# EAGLE board mainboard (EAGLE 6.2)
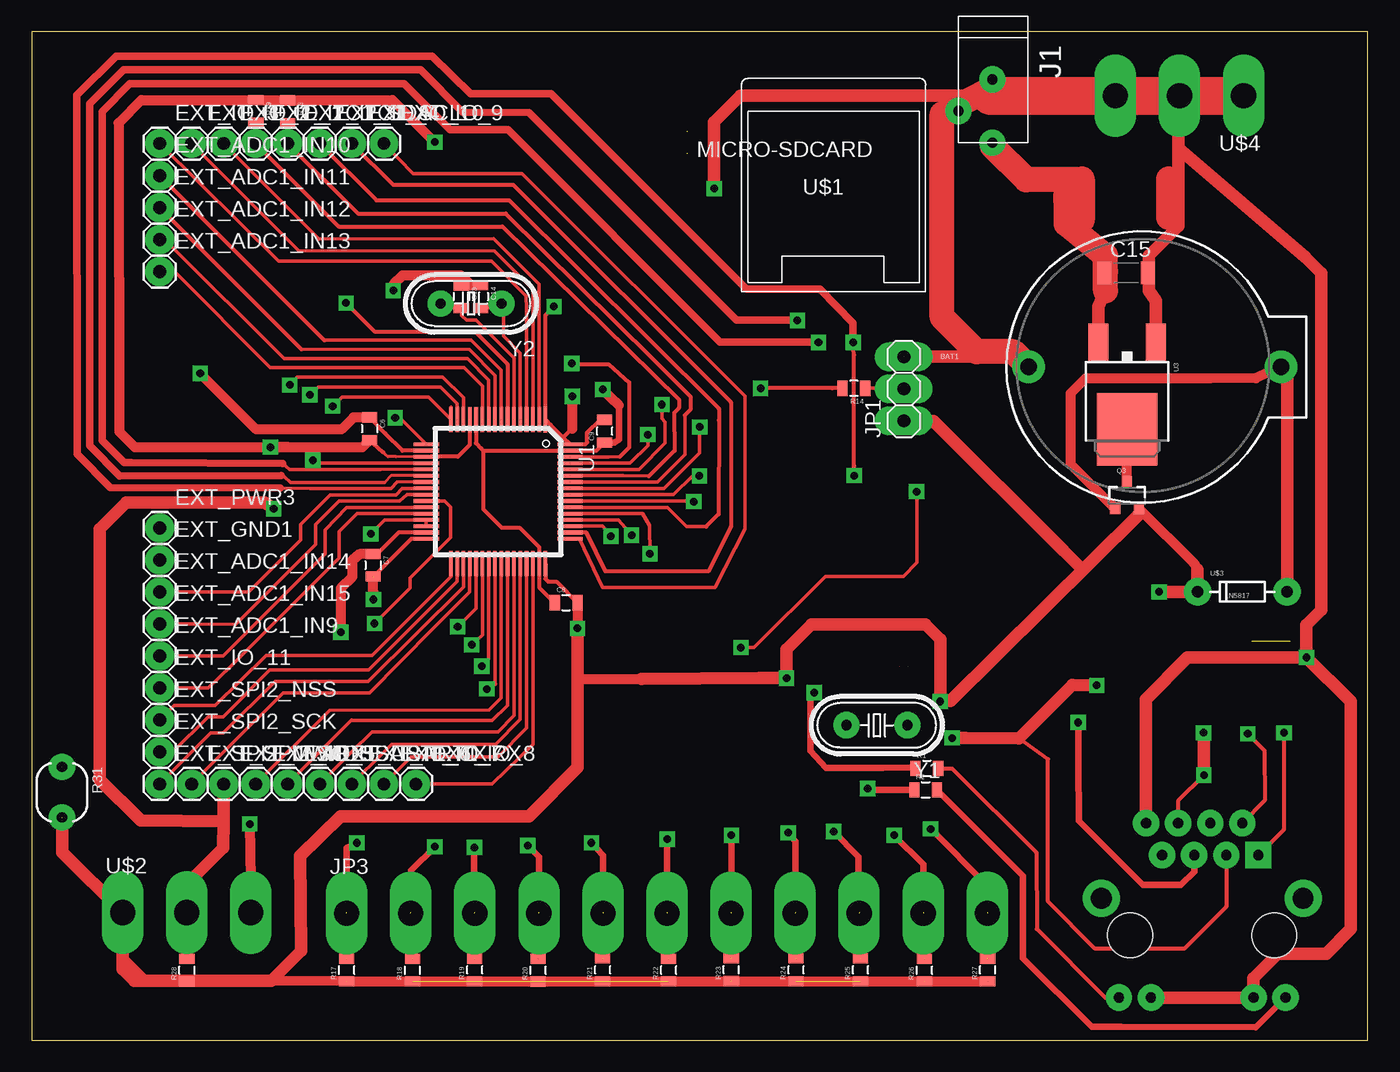
[diagram p0: board, top side]
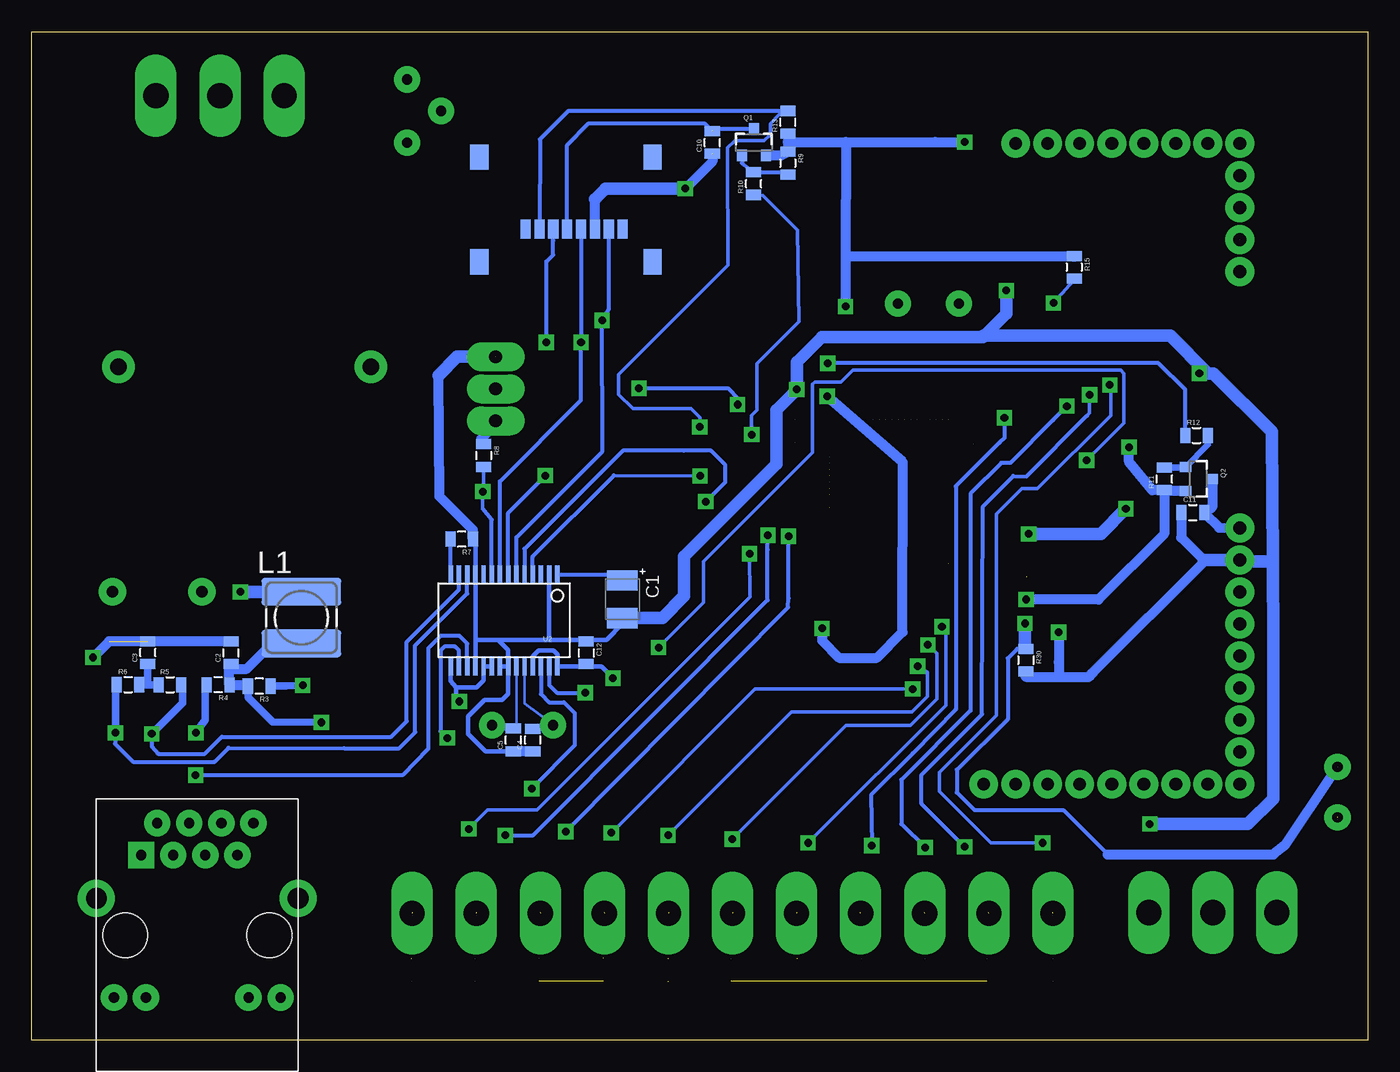
[diagram p1: board, bottom side, seen from below]

Size 105.97 x 79.98 mm. Coordinates in mm from the lower left corner, seen from the top.
Outline: 0,0 105.97,0 105.97,79.98 0,79.98 0,0
Copper layers (1*16): Top 0.035mm / dielectric 1.5mm / Bottom 0.035mm
Design rules: minimum track width 10mil, minimum drill 32mil, track to track 12mil, track to pad 12mil, pad to pad 12mil, via to via 12mil, smd to smd 8mil, copper to edge 40mil, drill to drill 40mil, minimum pad ring 25mil, minimum via ring 12mil, stop-mask expansion 4mil, vias tented up to drill 0mil, thermal gap 10mil

## Footprints (pad centres in the part's own frame; a part is rotated, then mirrored left to right if it is on the bottom)
BATTCOM_20MM_PTH = drill 1.3: 1 20,0; 2 0,0
SMC_B = smd 1.6 x 2.4: + -1.5,0; - 1.5,0
0805 = smd 0.8 x 1.2: 1 -0.9,0; 2 0.9,0
C1206 = smd 1.092 x 1.8: 1 -1.718,0; 2 1.718,0
1X01 = drill 1.016 pad 1.88: 1 0,0
POWER_JACK_4.5 = drill 0.8: GND@1 0,0; GND@2 2.7,2.5; PWR 0,5
1X03 = drill 1.016 long: 1 -2.54,0; 2 0,0; 3 2.54,0
1X11 = drill 2 long: 1 -12.7,0; 2 -7.62,0; 3 -2.54,0; 4 2.54,0; 5 7.62,0; 6 12.7,0; 7 17.78,0; 8 22.86,0; 9 27.94,0; 10 33.02,0; 11 38.1,0
POWER-CHOKE_WE-TPC = smd 6.3 x 2.2: 1 0,2.05; 2 0,-2.05
SOT23-3 = smd 0.8 x 0.9: 1 -0.95,-1; 2 0.95,-1; 3 0,1.1
PHOTOCELL = drill 0.8 pad 1.676: 1 -2,0; 2 2,0
HR911105A = drill 0.813 pad 1.524: G+ 4.953,-6.604; G- 4.953,-4.064; GND -8.89,4.445; NC -6.35,3.175; P4 -8.89,-0.635; P5 -6.35,0.635; RD+ -6.35,-1.905; RD- -8.89,1.905; TD- -8.89,-3.175; Y+ 4.953,6.604; Y- 4.953,4.064 | drill 1.651 pad 2.159: SHIELD0 -2.921,8.001; SHIELD1 -2.921,-8.001 | drill 0.813 pad 1.524 square: TD+ -6.35,-4.445 | hole 3.556: 0,-5.715; 0,5.715
LQFP64_MILL = smd 2 x 0.287: 1 -5.7,3.75; 2 -5.7,3.25; 3 -5.7,2.75; 4 -5.7,2.25; 5 -5.7,1.75; 6 -5.7,1.25; 7 -5.7,0.75; 8 -5.7,0.25; 9 -5.7,-0.25; 10 -5.7,-0.75; 11 -5.7,-1.25; 12 -5.7,-1.75; 13 -5.7,-2.25; 14 -5.7,-2.75; 15 -5.7,-3.25; 16 -5.7,-3.75; 33 5.7,-3.75; 34 5.7,-3.25; 35 5.7,-2.75; 36 5.7,-2.25; 37 5.7,-1.75; 38 5.7,-1.25; 39 5.7,-0.75; 40 5.7,-0.25; 41 5.7,0.25; 42 5.7,0.75; 43 5.7,1.25; 44 5.7,1.75; 45 5.7,2.25; 46 5.7,2.75; 47 5.7,3.25; 48 5.7,3.75 | smd 0.287 x 2: 17 -3.75,-5.7; 18 -3.25,-5.7; 19 -2.75,-5.7; 20 -2.25,-5.7; 21 -1.75,-5.7; 22 -1.25,-5.7; 23 -0.75,-5.7; 24 -0.25,-5.7; 25 0.25,-5.7; 26 0.75,-5.7; 27 1.25,-5.7; 28 1.75,-5.7; 29 2.25,-5.7; 30 2.75,-5.7; 31 3.25,-5.7; 32 3.75,-5.7; 49 3.75,5.7; 50 3.25,5.7; 51 2.75,5.7; 52 2.25,5.7; 53 1.75,5.7; 54 1.25,5.7; 55 0.75,5.7; 56 0.25,5.7; 57 -0.25,5.7; 58 -0.75,5.7; 59 -1.25,5.7; 60 -1.75,5.7; 61 -2.25,5.7; 62 -2.75,5.7; 63 -3.25,5.7; 64 -3.75,5.7
SSOP28DB = smd 0.348 x 1.397: 1 -4.225,-3.656; 2 -3.575,-3.656; 3 -2.925,-3.656; 4 -2.275,-3.656; 5 -1.625,-3.656; 6 -0.975,-3.656; 7 -0.325,-3.656; 8 0.325,-3.656; 9 0.975,-3.656; 10 1.625,-3.656; 11 2.275,-3.656; 12 2.925,-3.656; 13 3.575,-3.656; 14 4.225,-3.656; 15 4.225,3.656; 16 3.575,3.656; 17 2.925,3.656; 18 2.275,3.656; 19 1.625,3.656; 20 0.975,3.656; 21 0.325,3.656; 22 -0.325,3.656; 23 -0.975,3.656; 24 -1.625,3.656; 25 -2.275,3.656; 26 -2.925,3.656; 27 -3.575,3.656; 28 -4.225,3.656
DPAK = smd 1.6 x 3: 1 -2.28,-5.31; 3 2.28,-5.31 | smd 4.826 x 5.715: 4 0,1.588
MICRO-SDCARD = smd 0.8 x 1.5 bottom: CD/DAT3 -2.1,0.75; CLK 1.2,0.75; CMD -1,0.75; DAT0 3.4,0.75; DAT1 4.5,0.75; DAT2 -3.2,0.75; GND 2.3,0.75; VCC 0.1,0.75 | smd 1.45 x 2 bottom: DAT3 -6.875,-4.95; DAT4 6.875,-4.95; DAT5 -6.875,3.35; DAT6 6.875,3.35
1X3_2.5 = drill 2 long: 1 -5.08,0; 2 0,0; 3 5.08,0
DIODE-ZENER = drill 0.9: P$1 -3.556,0; P$2 3.556,0
HC49U-V = drill 0.813: 1 -2.413,0; 2 2.413,0

## Placement (x,y rotation side)
BAT1  3V  [BATTCOM_20MM_PTH]  79.07,53.37 0 top
C1  10u  [SMC_B]  59.13,34.96 270 bottom
C2  10n  [0805]  90.15,30.71 90 bottom
C3  10n  [0805]  96.75,30.72 90 bottom
C4  18p  [0805]  66.23,23.79 90 bottom
C5  18p  [0805]  67.77,23.8 90 bottom
C6  100n  [0805]  26.81,48.48 270 top
C7  100n  [0805]  27.09,37.65 270 top
C8  100n  [0805]  42.39,34.67 0 top
C9  100n  [0805]  45.44,48.29 90 top
C10  100n  [0805]  52,71.18 90 bottom
C11  100n  [0805]  13.89,41.83 0 bottom
C12  100n  [0805]  61.99,30.71 270 bottom
C13  22p  [0805]  34.08,58.95 270 top
C14  22p  [0805]  35.6,58.96 270 top
C15  470nF  [C1206]  86.79,60.84 0 top
EXT_1WIRE  [1X01]  15.24,20.3 0 top
EXT_ADC1_IN9  [1X01]  10.16,30.46 0 top
EXT_ADC1_IN10  [1X01]  10.16,68.56 0 top
EXT_ADC1_IN11  [1X01]  10.16,66.02 0 top
EXT_ADC1_IN12  [1X01]  10.16,63.48 0 top
EXT_ADC1_IN13  [1X01]  10.16,60.94 0 top
EXT_ADC1_IN14  [1X01]  10.16,35.54 0 top
EXT_ADC1_IN15  [1X01]  10.16,33 0 top
EXT_GND1  [1X01]  10.16,38.08 0 top
EXT_I2C1_SCL  [1X01]  20.32,71.1 0 top
EXT_I2C1_SDA  [1X01]  17.78,71.1 0 top
EXT_IO_1  [1X01]  15.24,71.1 0 top
EXT_IO_2  [1X01]  12.7,71.1 0 top
EXT_IO_3  [1X01]  10.16,71.1 0 top
EXT_IO_4  [1X01]  22.86,71.1 0 top
EXT_IO_5  [1X01]  17.78,20.3 0 top
EXT_IO_6  [1X01]  25.4,20.3 0 top
EXT_IO_7  [1X01]  27.94,20.3 0 top
EXT_IO_8  [1X01]  30.48,20.3 0 top
EXT_IO_9  [1X01]  27.94,71.1 0 top
EXT_IO_10  [1X01]  25.4,71.1 0 top
EXT_IO_11  [1X01]  10.16,27.92 0 top
EXT_PWR3  [1X01]  10.16,40.62 0 top
EXT_SPI2_MISO  [1X01]  10.16,20.3 0 top
EXT_SPI2_MOSI  [1X01]  12.7,20.3 0 top
EXT_SPI2_NSS  [1X01]  10.16,25.38 0 top
EXT_SPI2_SCK  [1X01]  10.16,22.84 0 top
EXT_USART1_RX  [1X01]  22.86,20.3 0 top
EXT_USART1_TX  [1X01]  20.32,20.3 0 top
J1  PowJack4.5  [POWER_JACK_4.5]  76.2,76.18 180 top
JP1  [1X03]  69.16,51.64 90 top
JP3  [1X11]  37.69,10.06 0 top
L1  100 uH  [POWER-CHOKE_WE-TPC]  84.57,33.5 0 bottom
Q1  SI2301  [SOT23-3]  48.7,71.16 0 bottom
Q2  SI2301  [SOT23-3]  13.46,44.5 270 bottom
Q3  IRLML6402TRPBF  [SOT23-3]  86.87,43.17 0 top
R1  150  [0805]  70.99,21.54 0 top
R2  150  [0805]  70.9,19.84 0 top
R3  50 1%  [0805]  87.91,28.07 180 bottom
R4  50 1%  [0805]  91.17,28.17 180 bottom
R5  50 1%  [0805]  94.99,28.17 0 bottom
R6  50 1%  [0805]  98.32,28.18 0 bottom
R7  2k 1%  [0805]  71.86,39.72 180 bottom
R8  10k  [0805]  70.12,46.35 270 bottom
R9  10k  [0805]  46,69.54 270 bottom
R10  470  [0805]  48.72,67.92 90 bottom
R11  10k  [0805]  16.14,44.5 90 bottom
R12  470  [0805]  13.59,47.95 0 bottom
R13  10k  [0805]  46,72.78 90 bottom
R14  10k  [0805]  65.21,51.68 180 top
R15  10k  [0805]  23.29,61.28 270 bottom
R16  4.7k  [0805]  20.31,73.61 270 top
R17  10k  [0805]  24.99,5.55 90 top
R18  10k  [0805]  30.21,5.54 90 top
R19  10k  [0805]  35.14,5.56 90 top
R20  10k  [0805]  40.16,5.54 90 top
R21  10k  [0805]  45.28,5.57 90 top
R22  10k  [0805]  50.52,5.55 90 top
R23  10k  [0805]  55.49,5.58 90 top
R24  10k  [0805]  60.62,5.57 90 top
R25  10k  [0805]  65.74,5.57 90 top
R26  10k  [0805]  70.8,5.54 90 top
R27  10k  [0805]  75.82,5.56 90 top
R28  4.7k  [0805]  12.33,5.54 90 top
R29  4.7k  [0805]  17.79,73.63 270 top
R30  4.7k  [0805]  27.13,30.12 270 bottom
R31  PHOTOCELLPTH  [PHOTOCELL]  2.41,19.65 270 top
RJ1  HR911105A  [HR911105A]  92.83,8.32 270 bottom
U1  STM32F10XRXT6LQFP64  [LQFP64_MILL]  37,43.5 270 top
U2  [SSOP28DB]  68.5,33.28 180 bottom
U3  LM1117  [DPAK]  86.88,50.02 180 top
U$1  MICRO-SDCARD  [MICRO-SDCARD]  63.6,65.06 180 top
U$2  1X3_2.5  [1X3_2.5]  12.3,10.12 0 top
U$3  1N5817  [DIODE-ZENER]  96.01,35.55 0 top
U$4  1X3_2.5  [1X3_2.5]  91.03,74.88 180 top
Y1  25 MHz  [HC49U-V]  67.04,24.96 180 top
Y2  8 MHz  [HC49U-V]  34.86,58.41 180 top

## Library data of the parts
BAT1 R31 U$3 = SparkFun
C1-C14 EXT_1WIRE EXT_ADC1_IN9-EXT_ADC1_IN15 EXT_GND1 EXT_I2C1_SCL EXT_I2C1_SDA EXT_IO_1-EXT_IO_11 EXT_PWR3 EXT_SPI2_MISO EXT_SPI2_MOSI EXT_SPI2_NSS EXT_SPI2_SCK EXT_USART1_RX EXT_USART1_TX J1 JP1 JP3 L1 Q1-Q3 R1-R30 RJ1 U1-U3 U$1 U$2 U$4 Y1 Y2 = GravicapaLib
C15 = rcl

## Nets
+3V3: C6.2 C7.2 C8.2 C9.2 C12.2 JP1.1 L1.1 Q1.2 Q2.2 Q3.2 R8.1 R9.1 R11.1 R13.1 R15.1 R16.1 R17.1 R18.1 R19.1 R20.1 R21.1 R22.1 R23.1 R24.1 R25.1 R26.1 R27.1 R28.1 R29.1 R31.2 U1.1 U1.13 U1.19 U1.32 U1.48 U1.64 U2.15 U2.19 U2.20 U2.25 U2.28 U$2.1 U$3.P$1
ALARM_BUS0: JP3.1 R17.2 U1.14
ALARM_BUS1: JP3.2 R18.2 U1.15
ALARM_BUS2: JP3.3 R19.2 U1.16
ALARM_BUS3: JP3.4 R20.2 U1.17
ALARM_BUS4: JP3.5 R21.2 U1.37
ALARM_BUS5: JP3.6 R22.2 U1.38
ALARM_BUS6: JP3.7 R23.2 U1.39
ALARM_BUS7: JP3.8 R24.2 U1.40
ALARM_BUS8: JP3.9 R25.2 U1.51
ALARM_BUS9: JP3.10 R26.2 U1.52
ALARM_BUS10: JP3.11 R27.2 U1.53
ETH_CS: R8.2 U1.20 U2.9
ETH_INT: U1.56 U2.4
ETH_NC: U1.55 U2.5
EXT_PWR: C11.2 EXT_PWR3.1 Q2.3
EXT_PWR_SW: R12.1 U1.62
GND: BAT1.2 C1.- C2.2 C3.2 C4.1 C5.1 C6.1 C7.1 C8.1 C9.1 C10.1 C11.1 C12.1 C13.1 C14.1 C15.2 EXT_GND1.1 J1.GND@1 J1.GND@2 JP1.3 R7.1 R30.2 RJ1.G- RJ1.GND RJ1.Y- U1.12 U1.18 U1.31 U1.47 U1.63 U2.2 U2.11 U2.18 U2.21 U2.22 U3.1 U$1.GND U$2.3 U$4.1 U$4.2 U$4.3
I2C1_SCL: EXT_I2C1_SCL.1 R16.2 U1.58
I2C1_SDA: EXT_I2C1_SDA.1 R29.2 U1.59
LEDA: R1.1 U2.27
LEDB: R2.1 U2.26
N$1: C2.1 L1.2 R3.2 R4.1 RJ1.P5
N$2: R2.2 RJ1.G+
N$3: R1.2 RJ1.Y+
N$4: R7.2 U2.14
N$5: C5.2 U2.23 Y1.1
N$6: C4.2 U2.24 Y1.2
N$7: C1.+ U2.1
N$8: Q2.1 R11.2 R12.2
N$9: C3.1 R5.1 R6.2
N$10: Q1.1 R9.2 R10.2
N$11: C10.2 Q1.3 U$1.VCC
N$12: EXT_IO_1.1 U1.2
N$13: R14.2 U1.60
N$14: JP1.2 R14.1
N$15: R15.2 U1.7
N$16: C14.2 U1.5 Y2.1
N$17: C13.2 U1.6 Y2.2
N$18: C15.1 J1.PWR U3.3
N$19: EXT_IO_2.1 U1.3
N$20: EXT_IO_3.1 U1.4
N$21: EXT_IO_4.1 U1.54
N$22: EXT_IO_5.1 U1.41
N$23: EXT_USART1_TX.1 U1.42
N$24: EXT_USART1_RX.1 U1.43
N$25: EXT_IO_6.1 U1.44
N$26: EXT_IO_7.1 U1.45
N$27: EXT_IO_8.1 U1.46
N$28: EXT_IO_9.1 U1.49
N$29: EXT_IO_10.1 U1.50
N$30: R30.1 R31.1 U1.26
N$31: EXT_ADC1_IN9.1 U1.27
N$32: EXT_ADC1_IN15.1 U1.25
N$33: EXT_ADC1_IN14.1 U1.24
N$34: EXT_ADC1_IN13.1 U1.11
N$35: EXT_ADC1_IN12.1 U1.10
N$36: EXT_ADC1_IN11.1 U1.9
N$37: EXT_ADC1_IN10.1 U1.8
N$38: BAT1.1 Q3.1 U$3.P$2
N$39: EXT_IO_11.1 U1.28
N$42: Q3.3 U3.4
RESET: U2.10
SD_CS: R13.2 U1.57 U$1.CD/DAT3
SDCARD_PWR_SW: R10.1 U1.61
SPI1_MISO: U1.22 U2.6 U$1.DAT0
SPI1_MOSI: U1.23 U2.7 U$1.CMD
SPI1_SCK: U1.21 U2.8 U$1.CLK
SPI2_MISO: EXT_SPI2_MISO.1 U1.35
SPI2_MOSI: EXT_SPI2_MOSI.1 U1.36
SPI2_NSS: EXT_SPI2_NSS.1 U1.33
SPI2_SCK: EXT_SPI2_SCK.1 U1.34
TPIN+: R5.2 RJ1.TD- U2.13
TPIN-: R6.1 RJ1.TD+ U2.12
TPOUT+: R4.2 RJ1.RD- U2.17
TPOUT-: R3.1 RJ1.RD+ U2.16
USART3_1WIRE: EXT_1WIRE.1 R28.2 U1.29 U1.30 U$2.2

## Tracks (layer width: path | path; a pad name or v marks a point on that pad's centre or on a via)
+3V3  (via drill 0.6)  (16 unrouted)
  Top 0.25: U1.19 30.48,46.25 28.91,46.26 28.27,46.26 27.89,46.6
  Top 0.287: U1.32 31.17,39.75 | U1.48 | R29.1 17.82,74.54 R16.1 | U$2.1 | C8.2 | Q3.2 | U$3.P$1 | C6.2 27.1,47.29 | C7.2 27.1,35.54 | R28.1 12.7,4.69 | U1.19 | U1.19 | 31.65,46.25 31.64,46.25 30.48,46.25 | U1.1 41.17,48.77 | U1.64 | U1.64 | JP1.1
  Top 0.3: U1.32 31.17,39.75 30.1,39.75 28.4,38.04 C7.2 | U1.48 40.75,36.58 40.98,36.35 41.63,36.35 C8.2 | C9.2 45.11,49.19 44.07,48.19 44.07,47.4 43.92,47.25 U1.64 42.15,47.8 | U1.13 34.75,47.2 33.81,46.25 31.65,46.25 | 42.15,47.8 41.17,48.77 U1.1 40.75,57.48 v41.43,58.17 | 42.15,47.8 42.88,48.49 | 27.89,46.6 27.1,47.29 26.8,47.57
  Top 0.8: 92.46,37.32 92.2,37.77 Q3.2 87.82,41.68 83.31,37.33 | v27.1,34.94 27.1,35.54 27.1,36.54 | 26.8,47.57 26.24,47.01 20.37,47.01 | v31.98,71.21 31.93,71.24 28.63,74.54 17.82,74.54 8.71,74.54 6.9,72.72 6.97,48.24 8.2,47.01 20.37,47.01 | 20.37,47.01 v18.94,47.02 | v43.29,32.65 C8.2 43.27,28.65 48.35,28.64 | v42.88,51.04 42.88,48.49 | v72.06,26.85 72.87,26.89 | 12.32,4.67 11.46,4.69 | 12.35,4.65 9.1,4.65 7.22,6.54 | 75.83,4.67 R26.1 R25.1 R23.1 50.5,4.65 R17.1 19.01,4.71
  Top 1: v89.41,35.54 U$3.P$1 92.46,37.32 | 48.35,28.64 57.71,28.7 v59.87,28.7 59.87,30.99 61.85,32.97 70.87,32.97 72.06,31.78 v72.06,26.85 | 83.31,37.33 81.84,38.8 71.5,49.1 JP1.1 | 72.87,26.89 87.82,41.68 | R31.2 2.44,14.9 U$2.1 7.22,6.54 7.22,5.62 8.16,4.68 11.46,4.69 12.7,4.69 19.01,4.71 21.37,7.07 21.32,14.61 24.5,17.74 39.46,17.74 43.3,21.64 v43.29,32.65
  Bottom 0.287: U2.28 64.28,29.72 | U2.25 | U2.19 | U2.15 | R15.1 23.29,62.12 | R11.1 15.24,43.55 Q2.2 | Q1.2 | R13.1 | R9.1 | 84.58,35.54 L1.1 | R8.1 70.3,47.69 | C12.2 62.17,29.62 | JP1.1
  Bottom 0.3: v41.43,58.17 41.43,58.45
  Bottom 0.348: 62.63,29.62 U2.28 64.28,29.72 64.28,30.58 64.58,30.89 65.79,30.89 66.22,30.46 U2.25 | 62.63,29.62 62.17,29.62 61.01,29.62 60.78,29.62 v59.87,28.7 | 62.63,29.62 C12.2 | U2.20 U2.19 70.13,28.5 70.69,27.94 72.29,27.94 | 72.29,27.94 72.73,28.48 U2.15 | 72.29,27.94 72.29,27.08 v72.06,26.85
  Bottom 0.8: Q1.2 46.54,70.16 R9.1 46,71.2 | Q2.2 15.24,43.55 15.6,43.55 16.16,43.6 | 16.16,43.6 16.16,40.14 21.36,34.94 v27.1,34.94 | 16.16,43.6 17.1,43.6 18.95,45.88 v18.94,47.02 | R13.1 46,71.2 | 46,71.2 41.4,71.2 | 41.4,71.2 41.42,62.12 | 41.4,71.2 34.3,71.2 v31.98,71.21 | 23.29,62.12 41.42,62.12 | 41.42,62.12 41.42,59.11 v41.43,58.17 | v43.29,32.65 43.29,31.68 41.94,30.32 38.94,30.32 36.91,32.35 36.88,45.82 v42.88,51.04 | 70.3,47.69 70.03,47.96 JP1.1
  Bottom 1: v89.41,35.54 84.58,35.54
ALARM_BUS0  (via drill 0.6)  (3 unrouted)
  Top 0.287: U1.14 34.25,50.93 32.61,52.57 21.06,52.57 v20.47,51.95 20.78,51.98
  Top 0.5: v25.8,15.64 25,15.25 25,10.12
  Top 0.8: R17.2 25,10.12
  Bottom 0.287: v20.47,51.95 20.4,51.95 20.4,49.53 26.21,43.74 27.43,43.74 29.46,41.71 29.46,25.74 33.96,21.24 33.96,19.74 29.9,15.64 v25.8,15.64
ALARM_BUS1  (via drill 0.6)  (3 unrouted)
  Top 0.287: U1.15 33.75,50.47 32.44,51.79 23.34,51.79 22.71,51.79 v22.07,51.16
  Top 0.5: v31.98,15.32 30.08,13.44 30.08,10.12
  Top 0.8: R18.2 30.08,10.12
  Bottom 0.287: v22.07,51.16 22.07,49.71 22.28,49.51
  Bottom 0.3: v31.98,15.32 35.4,18.74 35.4,21.04 30.6,25.84 30.53,42.32 28.12,44.73 27.08,44.71 22.28,49.51
ALARM_BUS2  (via drill 0.6)  (3 unrouted)
  Top 0.287: 33.25,50.19 U1.16 31.47,50.98 24.61,50.98 v23.88,50.27
  Top 0.3: 35.11,12.76 35.16,10.12
  Top 0.5: v35.11,15.27 35.11,12.76 35.11,12.71
  Top 0.8: 35.13,6.45 35.16,10.12
  Bottom 0.3: v23.88,50.27 24.97,49.15 28.35,45.77 29.08,45.77 31.52,43.34 31.52,26.14 37,20.64 37,17.14 v35.11,15.27
ALARM_BUS3  (via drill 0.6)  (3 unrouted)
  Top 0.287: U1.17 29.21,49.34 v28.83,49.34
  Top 0.3: 40.24,10.12 40.44,8.49
  Top 0.5: v39.35,15.42 40.24,14.54 40.24,10.12
  Top 0.8: 40.44,8.49 R20.2
  Bottom 0.287: v28.83,49.34 28.83,48.77
  Bottom 0.3: v28.83,49.34 28.83,47.75 29.21,47.37 32.69,43.92 32.69,26.24 36.1,22.74 39.4,19.44 v39.35,15.42
ALARM_BUS4  (via drill 0.6)  (2 unrouted)
  Top 0.287: v33.78,32.77 35.25,34.24 U1.37
  Top 0.5: v44.4,15.64 45.32,14.64 45.32,10.12
  Top 0.8: 45.32,10.12 45.32,7.88 45.3,6.45
  Bottom 0.287: v33.78,32.77 33.48,32.29 33.48,26.54 v44.4,15.64
ALARM_BUS5  (via drill 0.6)  (2 unrouted)
  Top 0.287: 35.04,30.84 v34.9,31.34 35.75,32.14 U1.38
  Top 0.5: v50.4,15.94 50.4,10.12
  Top 0.8: 50.4,10.12 50.5,6.45
  Bottom 0.287: v34.9,31.34 34.2,30.64 34.2,27.04 36.3,24.94 41.4,24.94 v50.4,15.94
ALARM_BUS6  (via drill 0.6)  (2 unrouted)
  Top 0.287: v35.7,29.64 36.25,30.24 U1.39
  Top 0.5: v55.5,16.24 55.48,10.12
  Top 0.8: R23.2 55.48,10.12
  Bottom 0.287: v35.7,29.64 34.95,29.14 34.95,27.24 36.15,26.04 45.7,26.04 v55.5,16.24
ALARM_BUS7  (via drill 0.6)  (2 unrouted)
  Top 0.287: 36.75,28.24 U1.40
  Top 0.348: 36.75,28.24 v36.1,27.84
  Top 0.5: v60,16.44 60.56,15.74 60.56,10.12
  Top 0.8: 60.56,10.12 60.64,6.47
  Bottom 0.287: v36.1,27.84 48.6,27.84 v60,16.44
ALARM_BUS8  (via drill 0.6)  (2 unrouted)
  Top 0.287: U1.51 45.27,40.75 v45.95,39.96 | U1.51 | U1.51
  Top 0.3: 65.64,10.12 65.64,10.57 65.59,11.72
  Top 0.5: 65.59,11.72 65.59,14.54 v63.6,16.54
  Top 0.8: R25.2 65.64,10.12
  Bottom 0.3: v63.6,16.54 45.97,34.31 45.95,35.04 v45.95,39.96
ALARM_BUS9  (via drill 0.6)  (2 unrouted)
  Top 0.287: U1.52 46.56,41.25 v47.58,40.03 | U1.52
  Top 0.5: 70.72,10.12 70.72,13.91 v68.4,16.24
  Top 0.8: 70.72,10.12 R26.2
  Bottom 0.3: v68.4,16.24 66.2,16.24 47.6,34.88 47.6,38.89 v47.58,40.03
ALARM_BUS10  (via drill 0.6)  (2 unrouted)
  Top 0.287: U1.53 48.44,41.75 49.01,40.8 v49.04,38.56 | U1.53 | U1.53
  Top 0.5: v71.3,16.74 75.8,12.23 75.8,10.12
  Top 0.8: 75.8,10.12 75.83,6.47
  Bottom 0.287: v49.04,38.56 48.99,35.14 50.1,34.04 65.9,18.24 69.8,18.24 v71.3,16.74
ETH_CS  (via drill 0.6)
  Top 0.287: U1.20 22.57,45.76 v22.31,45.97 | v56.25,31.13 57.27,31.12 62.94,36.77 69.13,36.77 70.19,37.87 v70.19,43.49
  Bottom 0.287: U2.9 | v22.31,45.97 19.34,48.94 19.34,49.45 19.34,52.87 19.58,53.11 40.84,53.11 41.77,52.18 43.86,52.18 44.04,52.01 44.04,46.6 52.7,37.94 52.69,34.68 v56.25,31.13 | R8.2 70.12,43.56 v70.19,43.49 70.19,42.12 70.17,42.1
  Bottom 0.3: U2.9 69.48,41.28 70.17,42.1
ETH_INT  (via drill 0.6)  (1 unrouted)
  Top 0.287: U1.56 50.9,43.25 52.4,44.73 v52.96,44.73
  Bottom 0.287: v52.96,44.73 59.79,44.77 | U2.4
  Bottom 0.3: U2.4 66.23,38.33 59.79,44.77
ETH_NC  (via drill 0.6)
  Top 0.287: U1.55 52.05,42.75 v52.5,42.7 | U1.55 | U1.55
  Bottom 0.287: U2.5
  Bottom 0.3: v52.5,42.7 50.95,44.25 50.95,45.6 52.09,46.74 54.25,46.74 59.08,46.74 66.88,38.94 U2.5
EXT_PWR
  Bottom 0.287: Q2.3 | C11.2
  Bottom 0.8: Q2.3 12.36,42.24 C11.2 11.8,40.64 EXT_PWR3.1
EXT_PWR_SW  (via drill 0.6)  (1 unrouted)
  Top 0.287: U1.62 45.74,46.25 46.66,46.26
  Top 0.3: v42.85,53.67 43.28,53.62 45.74,53.6 47.4,52.15 47.4,46.99 46.66,46.26
  Bottom 0.287: R12.1
  Bottom 0.3: R12.1 14.5,51.6 16.61,53.67 v42.85,53.67
GND  (via drill 0.6)  (5 unrouted)
  Top 0.287: U1.31 31.09,40.25 | U1.47 40.25,38.49 | U3.1 89.15,57.57 | C13.1 | C14.1 | RJ1.GND | 96.88,3.35 RJ1.G- | RJ1.Y- 88.9,3.35 | U$2.3 | C8.1 | BAT1.2 78.74,53.32 BAT1.2 | J1.GND@2 73.43,74.08 | C6.1 26.8,49.37 | C7.1 27.5,38.64 | C15.2 88.9,60.94 88.58,60.94 | J1.GND@1 78.74,74.88 | 76.04,74.88 J1.GND@1 | J1.GND@1 75.8,75.32 | 95.97,74.88 U$4.1 | 91.44,74.88 U$4.2 | U$4.3 86.36,74.88 | U1.18 | U1.18 30.48,46.75 | U1.12 35.25,48.24 | U1.63 43.18,46.75
  Top 0.3: U1.31 31.09,40.25 29.1,40.25 27.5,38.64 C7.1 | C8.1 40.25,35.89 40.25,38.49 40.25,39.09 38.68,40.64 37.29,40.64 35.81,42.12 35.81,46.75 | U1.18 30.48,46.75 29.41,46.75 28.05,48.11 26.8,49.37 | U1.12 35.25,48.24 35.25,47.32 35.66,46.91 35.81,46.75 | C9.1 44.79,46.74 43.18,46.75 U1.63 35.81,46.75
  Top 0.5: C9.1 46.23,47.39 46.58,47.6 46.58,50.34
  Top 0.8: v17.3,17.14 17.38,12.66 U$2.3 | C7.1 26,38.54 25.43,38.04 25.43,36.74 24.53,35.84 v24.53,32.34 | C13.1 34.84,59.86 | 34.84,59.86 C14.1 | 34.84,59.86 34.06,60.64 29.39,60.64 28.72,59.97 v28.68,59.44 | 26.8,49.37 25.53,49.37 24.59,48.43 17.83,48.43 v13.37,52.87 13.36,52.89 | 46.58,50.34 v45.29,51.59
  Top 1: 90.93,65.97 90.93,64.55 88.58,62.21 88.58,60.94 88.58,59.41 89.15,58.65 89.15,57.57 89.15,55.33 | 90.93,65.97 90.17,65.26 | 90.93,65.97 90.93,68.12 | 90.93,68.12 90.93,70.73 | 90.17,68.27 90.93,68.12 | 77.93,54.51 75.34,54.18 JP1.3 | v54.13,67.52 54.1,72.78 56.2,74.88 76.04,74.88 | v101.09,30.34 101.09,32.92 102.26,34.09 102.26,60.81 100.99,62.08 90.93,70.73 | 90.93,70.73 90.93,74.37 91.44,74.88 | v101.09,30.34 91.66,30.34 88.37,27 RJ1.GND | 88.76,3.35 88.9,3.35 96.88,3.35 96.89,4.88 98.84,6.84 102.67,6.84 104.6,8.82 104.6,26.83 v101.09,30.34
  Top 2: 90.17,65.26 90.17,68.27 | BAT1.2 77.93,54.51 77.85,54.59 74.93,54.59 72.2,57.32 72.2,73.44 73.43,74.08 75.8,75.32
  Top 3: 76.04,74.88 78.74,74.88 86.36,74.88 91.44,74.88 95.97,74.88
  Bottom 0.287: U2.2 | U2.11 70.78,37.08 | U2.22 | U2.18 70.78,30.08 | U$1.GND | C11.1 | JP1.3 71.12,54.18 | BAT1.2 78.93,53.51 | C1.- 58.42,33.45 | C5.1 68.58,22.88 | C4.1 66.24,22.88 | 90.17,31.61 C2.2 | R7.1 71.13,40.61 | C12.1 | R30.2 | 30.48,55.86 30.45,55.83
  Bottom 0.348: 70.98,39.73 70.78,39.3 70.78,37.08 70.78,31.73 | U2.22 68.18,30.94 68.96,31.72 70.78,31.73 | U2.22 68.18,27.46 68.66,26.98 70.05,26.98 71.35,25.68 71.35,24.26 69.98,22.88 68.58,22.88 67.77,22.88 | 70.78,31.73 70.78,30.08 | 70.78,31.73 64.93,31.73 | U2.2 64.93,31.73 | 64.93,31.73 62.67,31.73 | 62.67,31.73 60.38,31.73 59.05,33.07 C1.- | 62.67,31.73 C12.1 | U2.22 U2.21
  Bottom 0.8: C11.1 14.8,39.84 13,38.08 | v101.09,30.34 99.82,31.61 90.17,31.61 | R30.2 27.13,28.8 24.53,28.8 | v24.53,32.34 24.53,29.97 24.53,28.8 | 24.53,28.8 22.1,28.8 21.8,29.14 12.86,38.08 | U$1.GND 61.3,66.68 | C10.1 51.99,69.66 v54.13,67.52 | 66.24,22.88 67.77,22.88 | 70.98,39.73 70.98,40.47 71.13,40.61 73.62,43.11 73.69,52.71
  Bottom 1: 13,38.08 12.86,38.08 EXT_GND1.1 10.1,37.94 7.54,37.94 | 7.54,37.94 7.52,31.5 7.52,19.14 9.52,17.14 v17.3,17.14 | v28.68,59.44 28.68,57.61 30.45,55.83 30.53,55.76 40.77,55.76 43.29,55.76 45.29,53.76 v45.29,51.59 46.91,49.96 46.91,45.67 54.23,38.36 54.23,35.21 55.96,33.45 58.42,33.45 C1.- | JP1.3 71.12,54.18 72.21,54.18 73.69,52.71 | 61.3,66.68 60.46,67.52 v54.13,67.52 | 7.54,37.94 7.62,48.24 12.25,52.87 12.7,52.87 | 12.7,52.87 v13.37,52.87 | 30.48,55.86 15.69,55.86 12.7,52.87
I2C1_SCL  (1 unrouted)
  Top 0.287: U1.58 49.63,44.25 51.82,46.43 51.82,49.56 | R16.2 20.32,72.74
  Top 0.3: 20.32,72.74 EXT_I2C1_SCL.1 25.88,65.53 37.59,65.53 49.25,54.03 52.25,51.03 52.25,49.99 51.82,49.56
I2C1_SDA  (1 unrouted)
  Top 0.287: 48.95,44.72 46.9,44.75 U1.59 | R29.2 17.78,72.6
  Top 0.3: R29.2 17.78,72.6 EXT_I2C1_SDA.1 24.36,64.52 37.34,64.52 51.33,50.8 51.33,50.12 50.95,49.74 51,46.74 48.95,44.72
LEDA  (via drill 0.6)
  Top 0.287: R1.1
  Top 0.3: v62.05,27.54 61.75,27.21 | 69.73,21.62 R1.1
  Top 0.5: 61.75,27.21 61.75,22.94 63,21.6 67.5,21.6 69.73,21.62
  Bottom 0.287: U2.27
  Bottom 0.3: U2.27 64.93,28.15 64.32,27.54 v62.05,27.54
LEDB  (via drill 0.6)
  Top 0.287: R2.1
  Top 0.3: 66.44,19.84 v66.3,19.94
  Top 0.5: R2.1 66.44,19.84
  Bottom 0.287: U2.26
  Bottom 0.3: U2.26 65.58,27.43 64.92,26.78 63.75,26.78 62.91,25.94 62.91,23.37 v66.3,19.94
N$1  (via drill 0.6)
  Top 0.287: RJ1.P5
  Top 0.5: v82.99,25.19 82.99,22.02 83.03,17.38 88.12,12.29 91.14,12.3 92.19,13.35 RJ1.P5
  Bottom 0.287: L1.2 84.58,31.46 | 88.9,28.17 88.8,28.12 R3.2 R4.1 | C2.1 90.29,29.44
  Bottom 0.3: 90.29,29.44 90.23,29.39
  Bottom 0.6: 88.8,28.12 88.8,27.18 86.85,25.23 v82.99,25.19
  Bottom 0.8: 88.86,28.17 88.9,28.17 90.29,28.17 90.29,29.44 88.9,29.44 87.38,30.97 84.58,31.46
N$2
  Top 0.287: 99.42,3.35 RJ1.G+ | R2.2
  Top 0.5: R2.2 72.8,18.84 78.62,13.02 78.62,6.48 84.06,1.04 86.38,1.05 97.08,1.01 99.42,3.35
N$3
  Top 0.287: RJ1.Y+ 86.22,3.35 | R1.2
  Top 0.3: R1.2 73,21.54 79.68,14.88 79.7,8.81 85.15,3.35 86.22,3.35
N$4
  Bottom 0.287: U2.14 | R7.2 72.78,39.73
  Bottom 0.3: 72.78,39.73 72.78,37.9 U2.14
N$5
  Bottom 0.2: U2.23 67.53,25.1 67.77,24.68
  Bottom 0.287: U2.23 | C5.2 68.68,24.84 Y1.1
  Bottom 0.5: 67.77,24.68 68.68,24.84 69.42,24.97
N$6
  Bottom 0.2: U2.24 66.88,26.7 64.59,24.97
  Bottom 0.287: U2.24 | Y1.2 64.59,24.97 | C4.2 66.24,24.68
  Bottom 0.5: 66.24,24.68 64.59,24.97
N$7
  Bottom 0.287: U2.1 | C1.+
  Bottom 0.3: U2.1 59.94,36.93 C1.+
N$8
  Bottom 0.287: R12.2 | R11.2 15.24,45.4 Q2.1
  Bottom 0.3: 14.5,45.4 Q2.1
  Bottom 0.5: R12.2 12.7,47.24 Q2.1 | 16.16,45.4 15.24,45.4 14.5,45.4
N$9
  Bottom 0.287: R5.1 | 97.4,28.17 R6.2 | C3.1 96.77,29.81
  Bottom 0.6: R5.1 96.77,28.17 | 96.77,29.81 96.77,28.8 96.77,28.17 | 96.77,28.17 97.4,28.17
N$10
  Bottom 0.287: Q1.1 | R9.2 | R10.2 48.26,68.82
  Bottom 0.3: Q1.1 49.65,69.54 48.7,68.82 48.26,68.82 46.54,68.82 R9.2
N$11  (1 unrouted)
  Bottom 0.287: U$1.VCC | Q1.3
  Bottom 0.3: Q1.3 51.81,72.26 C10.2 52.62,72.7 61.8,72.7 63.5,70.98 U$1.VCC
N$12
  Top 0.287: EXT_IO_1.1 22.81,63.53 36.63,63.55 40.25,59.95 U1.2 | U1.2
N$13  (via drill 0.6)  (1 unrouted)
  Top 0.287: U1.60 48.16,45.25 50.23,47.32 50.23,49.02 49.99,49.28 v49.99,50.4 | R14.2 63.5,51.69
  Top 0.3: 64.33,51.69 63.5,51.69 v57.81,51.69
  Bottom 0.287: v49.99,50.4 49.93,50.45
  Bottom 0.3: v57.81,51.69 50.75,51.69 49.94,50.88 v49.99,50.4
N$14
  Top 0.287: R14.1 66.13,51.69 | JP1.2
  Top 0.3: JP1.2 66.13,51.69
N$15  (via drill 0.6)  (1 unrouted)
  Top 0.3: v24.94,58.45 27.2,56.19 35.15,56.19 37.74,53.6 37.74,49.84 U1.7
  Bottom 0.287: 23.29,60.32 v24.94,58.45 | R15.2
  Bottom 0.5: 23.29,60.32 R15.2
N$16  (1 unrouted)
  Top 0.2: 37.43,57.43 37.3,58.27 Y2.1
  Top 0.287: U1.5 38.75,54.49 37.43,55.81 37.43,57.43 | Y2.1 37.3,58.27 | C14.2
  Top 0.5: C14.2 Y2.1
N$17  (1 unrouted)
  Top 0.287: U1.6 38.25,54.08 35.25,57.08 34.49,57.08 34.11,57.46 C13.2 | Y2.2
  Top 0.5: C13.2 Y2.2
N$18
  Top 0.287: 84.59,58.14 U3.3 | 76.18,71.19 J1.PWR | C15.1 85.15,60.94
  Top 0.3: 83.3,68.24 83.31,68.27 | 83.31,65 82.04,65.93
  Top 1: 84.59,55.33 84.59,58.14 85.15,59.41
  Top 2: 85.15,59.41 85.15,60.94 85.15,62.21 82.04,64.74 82.04,65.93 82,66.94 83.3,68.24 78.88,68.23 76.18,70.89 76.18,71.19 | 83.31,68.27 83.31,65
N$19
  Top 0.287: U1.3 39.75,59.52 36.7,62.56 21.18,62.61 EXT_IO_2.1 | U1.3 | U1.3
N$20  (1 unrouted)
  Top 0.287: U1.4 39.25,57.99 39.22,59.01 36.47,61.75 23.16,61.75 19.6,61.75 EXT_IO_3.1
N$21  (1 unrouted)
  Top 0.287: U1.54 48.36,42.25 50.42,42.24 51.94,40.72 53.49,40.72
  Top 0.3: EXT_IO_4.1 27.36,66.6 37.87,66.6 54.51,50.07 54.51,49.15 54.48,41.71 53.49,40.72
N$22
  Top 0.287: EXT_IO_5.1 23.62,26.14 36.3,26.19 37.25,27.14 U1.41
N$23
  Top 0.287: U1.42 37.75,37.72 | 37.75,37.72 37.75,26.54 36.5,25.34 25.36,25.34 EXT_USART1_TX.1 25.4,25.38 | U1.42 37.75,37.72
N$24
  Top 0.287: U1.43 38.25,37.6 | 38.25,37.6 38.25,25.74 37,24.44 27,24.44 25.4,22.84 EXT_USART1_RX.1 | U1.43 38.25,37.6
N$25
  Top 0.287: U1.44 38.75,37.65 | 38.75,37.65 38.75,25.44 36.8,23.44 28.54,23.44 27.94,22.84 EXT_IO_6.1 | U1.44 38.75,37.65
N$26
  Top 0.287: U1.45 39.25,37.72 | 39.25,37.72 39.25,24.74 37,22.44 30.08,22.44 EXT_IO_7.1 | U1.45 39.25,37.72
N$27
  Top 0.287: EXT_IO_8.1 36.5,20.3 39.75,23.44 U1.46
N$28
  Top 0.287: U1.49 43.46,39.75 45.28,35.89 54.2,35.89 56.59,40.52 56.57,51.06 38.91,68.71 30.25,68.71 EXT_IO_9.1 | U1.49 | U1.49
N$29
  Top 0.287: U1.50 | U1.50
  Top 0.3: EXT_IO_10.1 28.68,67.82 38.2,67.82 55.45,50.57 55.45,40.72 53.66,37.17 45.51,37.17 44,40.25 U1.50
N$30  (via drill 0.6)  (1 unrouted)
  Top 0.287: U1.26 32.77,42.75 33.25,42.26 33.25,39.86 30.03,36.64 30.03,35.84 v27.2,33.04 | U1.26 | U1.26
  Bottom 0.287: 27.2,31.45 R30.1
  Bottom 0.3: R30.1 27.81,31.03 28.56,30.28 28.56,25.44 32.6,21.44 32.6,19.64 31.2,18.24 24.16,18.24 20.63,14.71 20.58,14.71 | 7.5,14.71 7.3,14.71
  Bottom 0.8: 20.63,14.71 7.5,14.71 6.6,15.44 2.82,21.06 R31.1
  Bottom 1: v27.2,33.04 27.2,32.11 27.2,31.45
N$31
  Top 0.287: U1.27 31.05,42.25 | 31.05,42.25 25,42.25 23.26,40.47 23.26,38.53 15.2,30.47 14.6,30.46 EXT_ADC1_IN9.1 | U1.27 31.05,42.25
N$32
  Top 0.287: U1.25 31.18,43.25 | 31.18,43.25 29.8,43.25 29.2,42.74 24.38,42.74 22.54,40.9 22.54,39.3 20.85,37.62 16.2,32.97 13.15,32.98 EXT_ADC1_IN15.1 | U1.25 31.18,43.25
N$33
  Top 0.287: EXT_ADC1_IN14.1 17.2,35.54 17.92,36.24 20.07,38.38 21.36,39.65 21.36,40.9 23.7,43.24 28.89,43.24 29.4,43.75 U1.24
N$34  (1 unrouted)
  Top 0.287: U1.11 35.75,51.87 34.31,53.33 18.92,53.33 11.3,60.98 EXT_ADC1_IN13.1
N$35  (2 unrouted)
  Top 0.287: U1.10 36.25,52.33 34.57,54.03 20.02,54.03 10.82,63.2 EXT_ADC1_IN12.1
N$36  (1 unrouted)
  Top 0.287: U1.9 36.75,52.71 34.72,54.74 21.39,54.79
  Top 0.3: EXT_ADC1_IN11.1 21.39,54.79
N$37  (1 unrouted)
  Top 0.287: U1.8 37.25,53.11 34.85,55.5 23.22,55.5
  Top 0.3: EXT_ADC1_IN10.1 23.22,55.5
N$38
  Top 0.287: Q3.1 85.64,42.44 | U$3.P$2 | BAT1.1 99.06,53.32 BAT1.1
  Top 0.8: BAT1.1 99.04,53.36 97.08,52.49 93.47,52.47 83.57,52.47 82.38,51.29 82.38,45.7 85.64,42.44 Q3.1
  Top 1: BAT1.1 99.58,52.86 99.57,36.23 U$3.P$2
  Bottom 0.287: BAT1.1 99.04,53.36
N$39
  Top 0.287: U1.28 31.23,41.75 | 31.23,41.75 25.8,41.75 24.39,40.34 24.39,38.24 22.71,36.57 15.78,29.64 14,27.92 EXT_IO_11.1 | U1.28 31.23,41.75
N$42
  Top 0.287: 86.87,48.43 U3.4 | Q3.3 86.87,45.7
  Top 0.8: Q3.3 86.87,45.7 86.87,48.43
SD_CS  (via drill 0.6)  (1 unrouted)
  Top 0.287: U1.57 50.14,43.75 52.98,46.56 v52.98,48.62
  Bottom 0.287: v52.98,48.62 52.98,49.38 53.67,50.07 58.29,50.07 59.41,51.18 59.41,52.78 50.76,61.44 50.77,70.39 50.77,70.75 50.19,71.33 47.88,71.33 47.4,71.81 47.4,72.68 46.66,73.41 R13.2 | U$1.CD/DAT3
  Bottom 0.3: R13.2 63.42,73.68 65.67,71.43 U$1.CD/DAT3
SDCARD_PWR_SW  (via drill 0.6)  (1 unrouted)
  Top 0.287: U1.61 47.47,45.75 48.87,47.15 v48.87,48.01
  Bottom 0.287: v48.87,48.01 48.87,49.53 48.46,49.96 48.46,53.65 45.14,56.98 45.24,64.22 47.98,66.96 48.7,67.02 R10.1
SPI1_MISO  (via drill 0.6)
  Top 0.25: U1.22 28.5,44.75 27.99,44.23
  Top 0.287: 27.99,44.23 20.57,44.23 20.03,44.67 19.97,44.67 19.8,44.75 | U1.22
  Top 0.6: 19.8,44.75 7.01,44.73 4.6,47.15 4.6,74.24 7.3,76.94 30.85,76.94 34.2,73.58 39.44,73.54 55.9,57.08 v60.73,57.08
  Bottom 0.287: U2.6 | U$1.DAT0
  Bottom 0.3: U$1.DAT0 60.2,57.94 v60.73,57.08 60.7,46.69 67.53,39.86 U2.6
SPI1_MOSI  (via drill 0.6)
  Top 0.25: U1.23 29,44.25
  Top 0.287: 29,44.25 28.5,43.74 22.11,43.74 19.73,43.76 | U1.23
  Top 0.3: 65.23,45.52 v65.23,44.76 65.23,54.33 v65.15,55.32
  Top 0.6: 19.73,43.76 6.25,43.82 3.61,46.46 3.6,74.94 6.7,78.04 31.77,78.04 34.8,75.04 41.2,75.04 56.7,59.54 62.5,59.54 65.15,56.84 v65.15,55.32
  Bottom 0.287: v65.15,55.32 65.15,56.54 | U2.7 | U$1.CMD
  Bottom 0.3: v65.15,55.32 65.15,61.74 64.62,62.26 64.62,63.43 U$1.CMD | U2.7 68.18,41.81 v65.23,44.76
SPI1_SCK  (via drill 0.6)
  Top 0.25: U1.21 28.3,45.25 27.7,45.24
  Top 0.287: 27.7,45.24 20.48,45.25 19.93,45.73 | 5.59,47.54 5.6,47.54 | U1.21
  Top 0.6: 5.59,47.54 7.37,45.8 7.92,45.78 19.93,45.73 | 5.6,47.54 5.6,73.64 7.8,75.84 29.54,75.84 33.2,72.18 37.8,72.18 54.6,55.34 v62.4,55.34
  Bottom 0.287: U2.8 68.83,36.97 | U$1.CLK 62.4,64.17
  Bottom 0.3: U$1.CLK 62.4,64.17 v62.4,55.34 62.4,50.74 68.83,44.3 68.83,36.97 U2.8
SPI2_MISO
  Top 0.287: EXT_SPI2_MISO.1 14.2,24.34 15.2,24.34 19.3,28.44 26.7,28.44 34.25,35.94 U1.35
SPI2_MOSI
  Top 0.287: EXT_SPI2_MOSI.1 15.6,23.2 19.95,27.54 26.8,27.54 31.8,32.59 34.75,35.54 U1.36
SPI2_NSS  (1 unrouted)
  Top 0.287: U1.33 33.25,36.76 27,30.51 18.6,30.51 14.58,26.52 11.3,26.52 EXT_SPI2_NSS.1
SPI2_SCK
  Top 0.2: 11.2,22.84 EXT_SPI2_SCK.1
  Top 0.287: 11.2,22.84 14,25.64 15.2,25.64 18.9,29.34 26.74,29.34 33.75,36.35 U1.34
TPIN+  (via drill 0.6)
  Top 0.287: RJ1.TD-
  Top 0.3: v96.44,24.29 97.77,22.96 97.78,18.99 RJ1.TD-
  Bottom 0.287: U2.13 | R5.2 93.98,27.92
  Bottom 0.3: v96.44,24.29 96.44,23.27 95.91,22.71 92.23,22.71 90.88,24.06 77.44,24.06 76.22,25.28 76.22,31.57 72.08,35.72 U2.13
  Bottom 0.6: R5.2 93.98,28.17 93.98,27.92 93.98,26.75 v96.44,24.29
TPIN-  (via drill 0.6)
  Top 0.287: RJ1.TD+
  Top 0.3: v99.31,24.36 99.28,16.68 RJ1.TD+
  Bottom 0.287: 71.42,36.76 U2.12 | 99.2,28.17 R6.1
  Bottom 0.3: 99.31,27.66 99.31,28.17 99.2,28.17 | v99.31,24.36 99.34,23.5 97.92,22.08 91.47,22.08 90.35,23.17 81.2,23.14 76.81,23.14 75.54,24.41 75.54,31.3 71.42,35.41 71.42,36.76
  Bottom 0.6: v99.31,24.36 99.31,27.66
TPOUT+  (via drill 0.6)
  Top 0.287: RJ1.RD- 90.92,17.76
  Top 0.3: v92.96,21 v92.95,20.99 90.92,18.96 90.92,17.76 RJ1.RD-
  Top 1: v92.94,24.36 92.94,21.59 v92.96,21
  Bottom 0.287: U2.17 | R4.2
  Bottom 0.3: U2.17 71.43,31.45 72.03,32.05 73.53,32.05 74.52,31.07 74.52,23.09 76.56,21 v92.96,21
  Bottom 0.6: v92.94,24.36 92.2,25.38 92.2,27.92 R4.2
TPOUT-  (via drill 0.6)
  Top 0.287: RJ1.RD+
  Top 0.3: 74.05,23.96 74.5,23.96 | v73.01,23.96 78.31,23.93 80.61,22.27 80.61,10.99 84.32,7.24 91.4,7.24 94.72,10.57 RJ1.RD+
  Top 1: v73.01,23.96 74.05,23.96 78.31,23.93 82.53,28.15 v84.47,28.13
  Bottom 0.287: U2.16 | R3.1
  Bottom 0.3: U2.16 72.08,30.89 72.39,31.2 73.23,31.2 73.54,30.89 73.54,24.49 v73.01,23.96
  Bottom 0.6: v84.47,28.13 85.8,28.07 R3.1
USART3_1WIRE  (via drill 0.6)
  Top 0.287: U1.29 U1.30 | U1.29 28,41.25 v26.9,40.14 | U1.29 | U$2.2 | 12.35,6.45 R28.2
  Top 0.8: U$2.2 12.35,6.45
  Top 1: EXT_1WIRE.1 15.24,17.34 | U$2.2 12.3,12.33 15.2,15.23 15.24,17.34 | 15.24,17.34 8.67,17.41 5.39,20.63 5.4,40.54 7.5,42.64 18.5,42.64 v19.2,42.14
  Bottom 1: v26.9,40.14 21.2,40.14 v19.2,42.14